# EAGLE board String_Thing_1.0 (EAGLE 6.1)
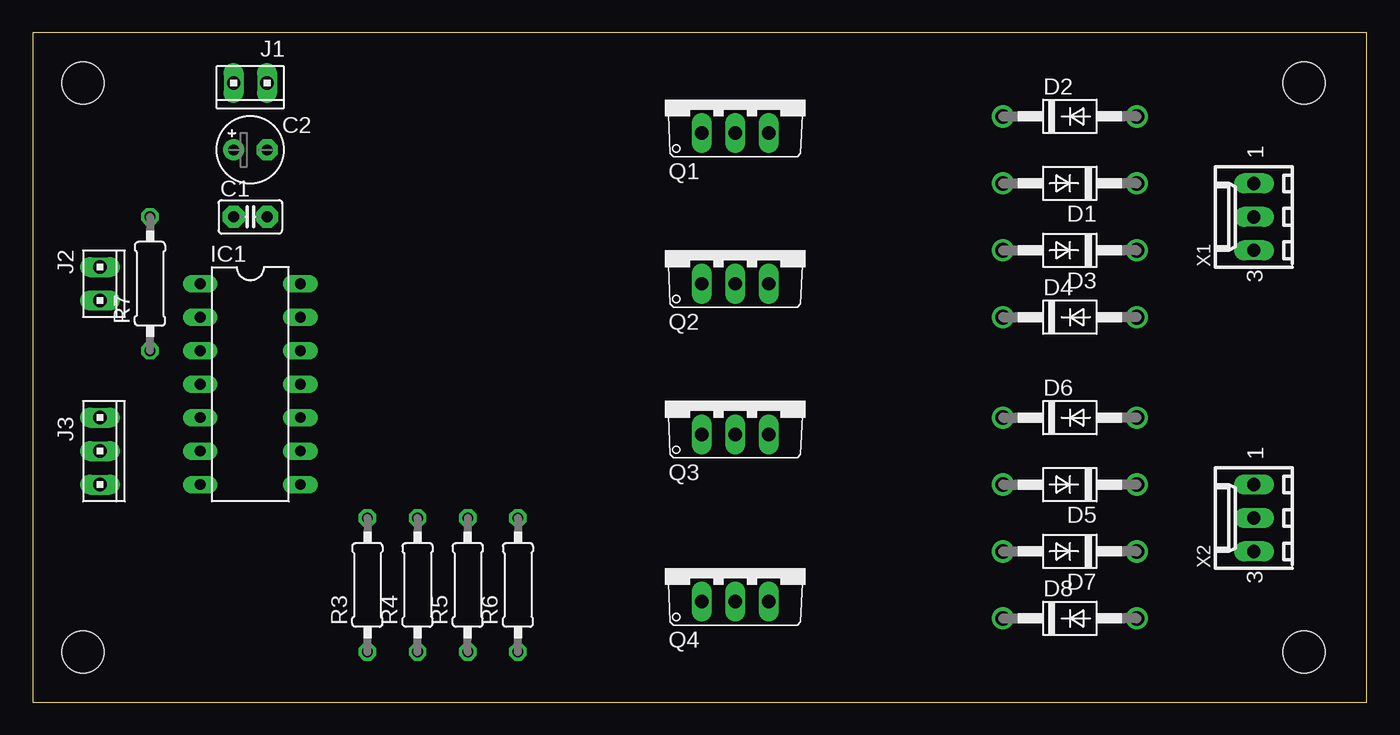
[diagram p0: board, top side]
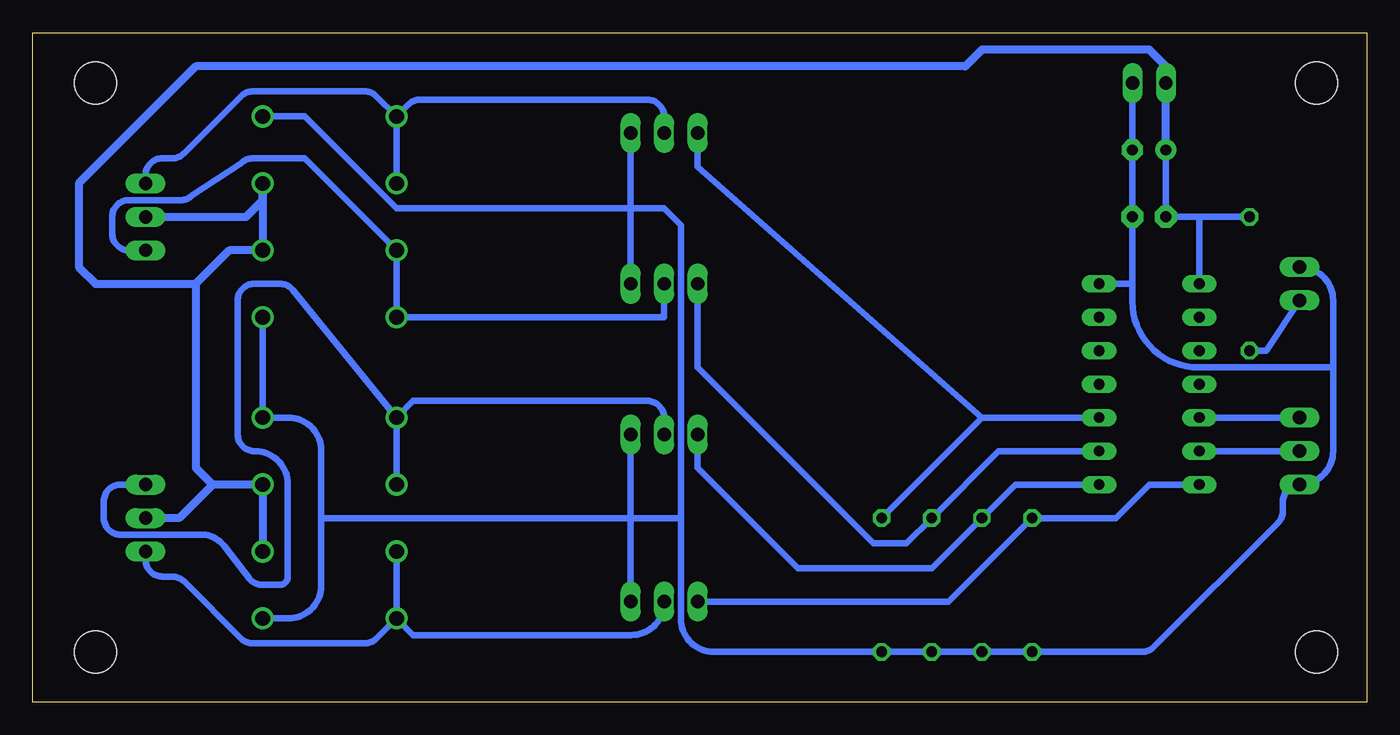
[diagram p1: board, bottom side, seen from below]

Size 101.27 x 50.79 mm. Coordinates in mm from the lower left corner, seen from the top.
Outline: 0,0 101.27,0 101.27,50.79 0,50.79 0,0
Copper layers (1*16): Top 0.035mm / dielectric 1.5mm / Bottom 0.035mm
Design rules: minimum track width 20mil, minimum drill 24mil, track to track 8mil, track to pad 8mil, pad to pad 8mil, via to via 8mil, smd to smd 8mil, copper to edge 40mil, drill to drill 8mil, minimum pad ring 10mil, minimum via ring 8mil, stop-mask expansion 4mil, vias tented up to drill 0mil, thermal gap 10mil
Holes 3.2 mm at 3.81,46.99 3.81,3.81 96.52,3.81 96.52,46.99

## Footprints (pad centres in the part's own frame; a part is rotated, then mirrored left to right if it is on the bottom)
C025-025X050 = drill 0.813 pad 1.676 octagon: 1 -1.27,0; 2 1.27,0
E2,5-5 = drill 0.813 pad 1.6: + -1.27,0 | drill 0.813 pad 1.6 octagon: - 1.27,0
DO41-10 = drill 1.118: A 5.08,0; C -5.08,0
DIL14 = drill 0.813 long: 1 -7.62,-3.81; 2 -5.08,-3.81; 3 -2.54,-3.81; 4 0,-3.81; 5 2.54,-3.81; 6 5.08,-3.81; 7 7.62,-3.81; 8 7.62,3.81; 9 5.08,3.81; 10 2.54,3.81; 11 0,3.81; 12 -2.54,3.81; 13 -5.08,3.81; 14 -7.62,3.81
10X02MTA = drill 1.016 long: 1 1.27,0; 2 -1.27,0
10X03MTA = drill 1.016 long: 1 2.54,0; 2 0,0; 3 -2.54,0
TO220V = drill 1.016 long: 1 -2.54,-2.54; 2 0,-2.54; 3 2.54,-2.54
0207/10 = drill 0.813 octagon: 1 -5.08,0; 2 5.08,0
6410-03 = drill 1.016 long: 1 2.54,0; 2 0,0; 3 -2.54,0

## Placement (x,y rotation side)
C1  [C025-025X050]  16.51,36.83 0 top
C2  [E2,5-5]  16.51,41.91 0 top
D1  1N4004  [DO41-10]  78.74,39.37 180 top
D2  1N4004  [DO41-10]  78.74,44.45 0 top
D3  1N4004  [DO41-10]  78.74,34.29 180 top
D4  1N4004  [DO41-10]  78.74,29.21 0 top
D5  1N4004  [DO41-10]  78.74,16.51 180 top
D6  1N4004  [DO41-10]  78.74,21.59 0 top
D7  1N4004  [DO41-10]  78.74,11.43 180 top
D8  1N4004  [DO41-10]  78.74,6.35 0 top
IC1  PIC16F676P  [DIL14]  16.51,24.13 270 top
J1  [10X02MTA]  16.51,46.99 180 top
J2  [10X02MTA]  5.08,31.75 270 top
J3  [10X03MTA]  5.08,19.05 270 top
Q1  [TO220V]  53.34,45.72 0 top
Q2  [TO220V]  53.34,34.29 0 top
Q3  [TO220V]  53.34,22.86 0 top
Q4  [TO220V]  53.34,10.16 0 top
R3  [0207/10]  25.4,8.89 90 top
R4  [0207/10]  29.21,8.89 90 top
R5  [0207/10]  33.02,8.89 90 top
R6  [0207/10]  36.83,8.89 90 top
R7  [0207/10]  8.89,31.75 90 top
X1  22-27-2031-03  [6410-03]  92.71,36.83 90 top
X2  22-27-2031-03  [6410-03]  92.71,13.97 90 top

## Library data of the parts
C1 C2 Q1-Q4 = adafruit
D1-D8 = diode
IC1 = microchip; MF: MICROCHIP; MPN: PIC16F676-I/P; OC_FARNELL: 9760512; OC_NEWARK: 54K2829
J1-J3 = con-amp
R3-R7 = resistor
X1 X2 = con-molex; OC_FARNELL: unknown; OC_NEWARK: unknown

## Nets
GND: C1.2 C2.- D2.A D4.A D6.A D8.A IC1.14 J1.2 J2.2 J3.1 Q1.3 Q2.3 Q3.3 Q4.3 R3.1 R4.1 R5.1 R6.1
N$1: IC1.7 Q4.1 R3.2
N$2: IC1.8 Q3.1 R4.2
N$3: IC1.9 Q2.1 R5.2
N$4: IC1.10 Q1.1 R6.2
N$5: D1.A D2.C Q1.2 X1.1
N$6: D3.A D4.C Q2.2 X1.3
N$7: D5.A D6.C Q3.2 X2.1
N$8: D7.A D8.C Q4.2 X2.3
N$9: J2.1 R7.1
N$10: IC1.5 J3.3
N$11: IC1.6 J3.2
VCC: C1.1 C2.+ D1.C D3.C D5.C D7.C IC1.1 J1.1 R7.2 X1.2 X2.2

## Tracks (layer width: path | path; a pad name or v marks a point on that pad's centre or on a via)
GND
  Bottom 0.508: Q1.3 55.88,37.47 | 55.88,37.47 Q2.3 | D2.A 80.64,44.45 73.66,37.47 55.88,37.47 | Q3.3 55.88,13.97 | 79.38,13.97 79.38,8.85 arc90 81.88,6.35 D8.A | 79.38,13.97 79.38,19.09 arc-90 81.88,21.59 D6.A D4.A | 79.38,13.97 55.88,13.97 | 55.88,37.47 53.34,37.47 52.07,36.2 52.07,13.97 | 17.78,31.75 C1.2 C2.- J1.2 | 2.54,25.4 2.54,19.05 arc90 J3.1 arc-90 6.35,15.24 6.35,14.5 arc45 6.72,13.6 16.14,4.18 arc45 17.04,3.81 R3.1 R4.1 R5.1 R6.1 49.57,3.81 arc90 52.07,6.31 52.07,13.97 | J2.2 arc90 2.54,30.48 2.54,25.4 | 2.54,25.4 12.78,25.4 arc90 17.78,30.4 17.78,31.75 | 17.78,31.75 IC1.14 | 52.07,13.97 55.88,13.97 | 55.88,13.97 Q4.3
N$1
  Bottom 0.508: IC1.7 16.51,16.51 19.05,13.97 R3.2 31.75,7.62 Q4.1
N$2
  Bottom 0.508: IC1.8 26.67,16.51 R4.2 33.02,10.16 43.18,10.16 50.8,17.78 Q3.1
N$3
  Bottom 0.508: IC1.9 27.94,19.05 R5.2 34.92,12.06 37.47,12.06 50.8,25.4 Q2.1
N$4
  Bottom 0.508: 29.21,21.59 IC1.10 | R6.2 29.21,21.59 | 29.21,21.59 50.8,40.64 Q1.1
N$5
  Bottom 0.508: D2.C 72.76,45.35 arc45 71.86,45.72 54.61,45.72 arc90 53.34,44.45 Q1.2 | D2.C D1.A | D2.C 75.19,45.98 arc-45 76.09,46.35 84.56,46.35 arc-45 85.46,45.98 89.8,41.65 arc45 90.7,41.27 91.44,41.27 arc-90 92.71,40.01 X1.1
N$6
  Bottom 0.508: Q2.2 53.34,29.21 D4.C D3.A 80.64,41.27 84.56,41.27 arc-45 85.46,40.9 89.16,38.47 arc45 90.06,38.1 93.98,38.1 arc-90 95.25,36.83 95.25,35.56 arc-90 93.98,34.29 X1.3
N$7
  Bottom 0.508: Q3.2 53.34,21.59 arc-90 54.61,22.86 72.39,22.86 D6.C | D6.C D5.A | X2.1 94.61,16.51 arc-90 95.89,15.24 95.89,13.97 arc-90 94.61,12.7 88.16,12.7 arc45 86.62,11.69 84.84,9.38 arc-52 83.84,8.89 82.55,8.89 arc-90 81.92,9.53 81.92,16.55 arc-90 84.42,19.05 84.45,19.05 arc90 85.72,20.32 85.72,30.48 arc90 84.45,31.75 82.52,31.75 arc51 81.53,31.28 D6.C
N$8
  Bottom 0.508: Q4.2 53.34,7.58 arc90 55.84,5.08 72.39,5.08 D8.C | D8.C D7.A | X2.3 92.71,10.79 arc-90 91.44,9.53 90.7,9.53 arc45 89.8,9.15 85.46,4.82 arc-45 84.56,4.45 76.09,4.45 arc-45 75.19,4.82 D8.C
N$9
  Bottom 0.508: R7.1 7.62,26.67 J2.1
N$10
  Bottom 0.508: J3.3 IC1.5
N$11
  Bottom 0.508: J3.2 IC1.6
VCC
  Bottom 0.508: 12.7,36.83 R7.2 | 12.7,36.83 C1.1 C2.+ | 12.7,36.83 IC1.1
  Bottom 0.61: D7.C D5.C 87.63,16.51 | C2.+ J1.1 15.24,48.26 16.51,49.53 29.21,49.53 30.48,48.26 88.9,48.26 97.79,39.37 97.79,33.02 96.52,31.75 88.9,31.75 | 88.9,31.75 86.36,34.29 D3.C D1.C 83.82,38.1 85.09,36.83 X1.2 | 88.9,31.75 88.9,17.78 87.63,16.51 | 87.63,16.51 90.17,13.97 X2.2